# EAGLE board DevBoard PCB (EAGLE 9.7.0)
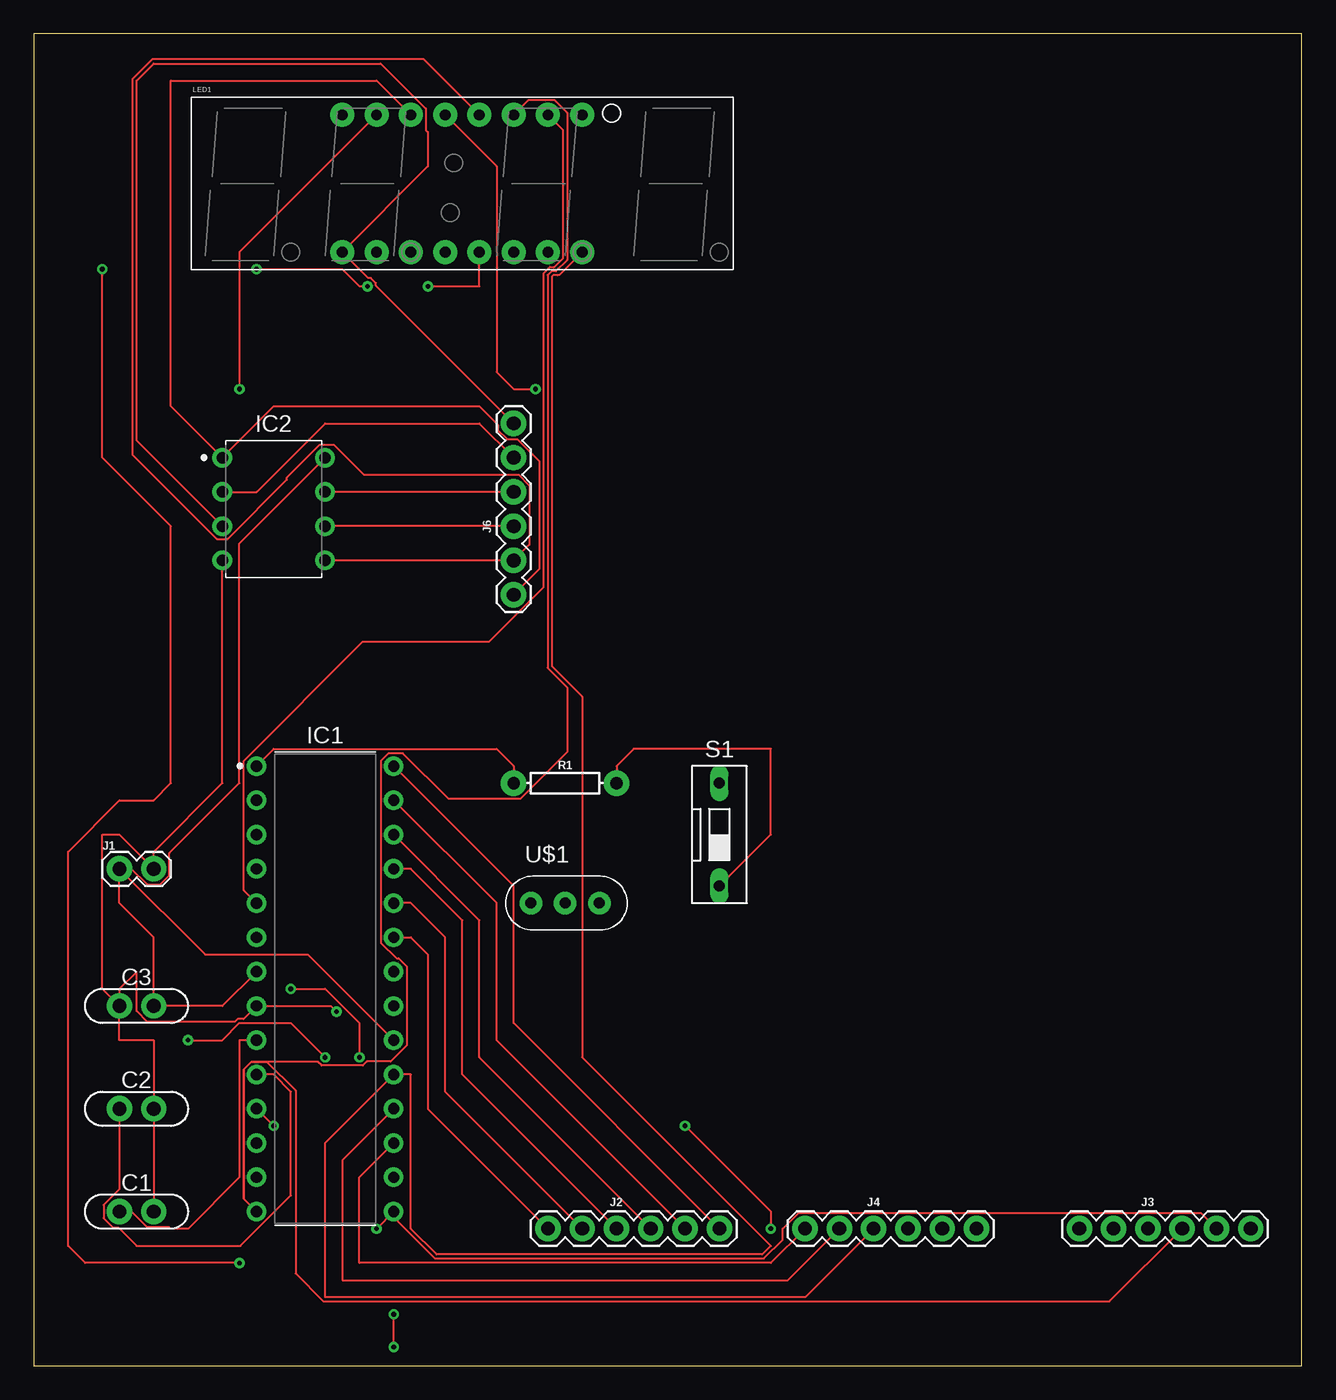
[diagram p0: board, top side]
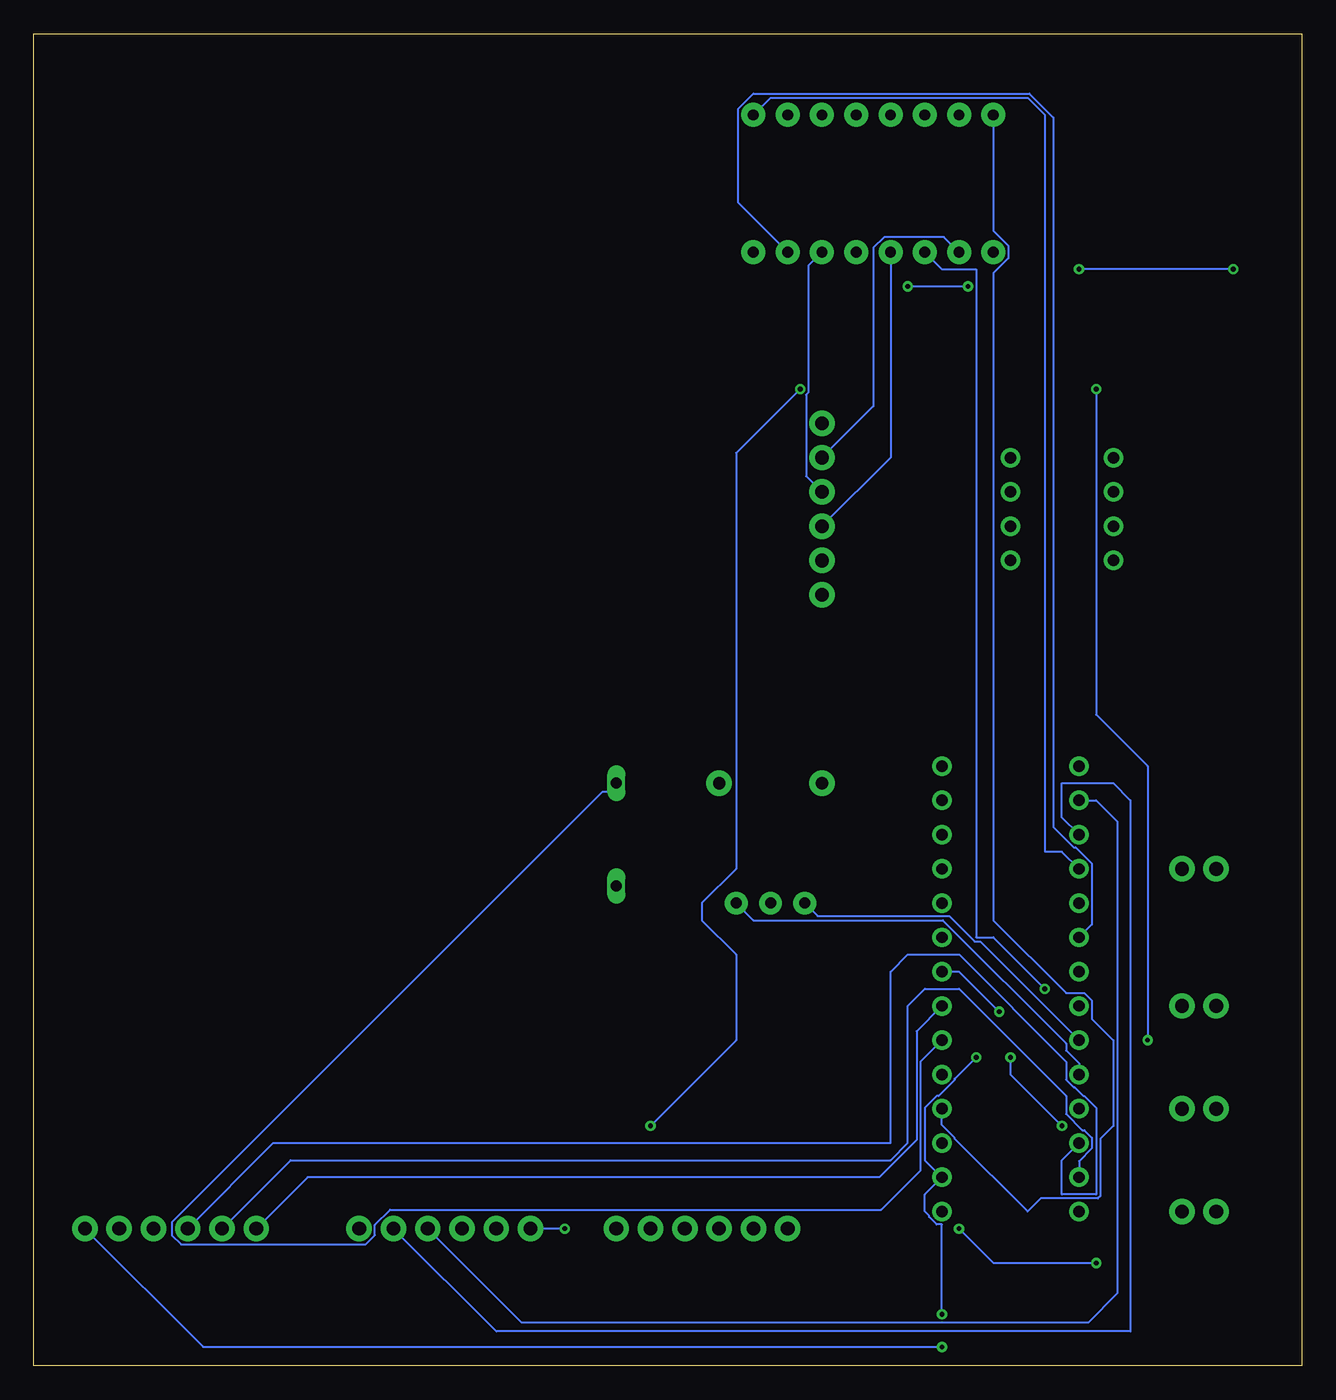
[diagram p1: board, bottom side, seen from below]

Size 93.96 x 98.73 mm. Coordinates in mm from the lower left corner, seen from the top.
Outline: 0,0 93.96,0 93.96,98.73 0,98.73 0,0
Copper layers (1*16): Top 0.035mm / dielectric 1.5mm / Bottom 0.035mm
Design rules "Fusion Electronics Design Rules": minimum track width 6mil, minimum drill 0.35mm, track to track 6mil, track to pad 6mil, pad to pad 6mil, via to via 6mil, smd to smd 6mil, copper to edge 40mil, drill to drill 6mil, minimum pad ring 10mil, minimum via ring 8mil, stop-mask expansion 4mil, vias tented up to drill 9999mil, thermal gap 10mil

## Footprints (pad centres in the part's own frame; a part is rotated, then mirrored left to right if it is on the bottom)
CAP-THRU-2.54MM = drill 1.016 pad 1.88: 1 -1.27,0; 2 1.27,0
DIP1016W53P254L3467H457Q28B = drill 0.841 pad 1.441: 1 -5.08,16.51; 2 -5.08,13.97; 3 -5.08,11.43; 4 -5.08,8.89; 5 -5.08,6.35; 6 -5.08,3.81; 7 -5.08,1.27; 8 -5.08,-1.27; 9 -5.08,-3.81; 10 -5.08,-6.35; 11 -5.08,-8.89; 12 -5.08,-11.43; 13 -5.08,-13.97; 14 -5.08,-16.51; 15 5.08,-16.51; 16 5.08,-13.97; 17 5.08,-11.43; 18 5.08,-8.89; 19 5.08,-6.35; 20 5.08,-3.81; 21 5.08,-1.27; 22 5.08,1.27; 23 5.08,3.81; 24 5.08,6.35; 25 5.08,8.89; 26 5.08,11.43; 27 5.08,13.97; 28 5.08,16.51
DIP787W55P254L958H533Q8B-8P3 = drill 0.852 pad 1.452: 1 -3.81,3.81; 2 -3.81,1.27; 3 -3.81,-1.27; 4 -3.81,-3.81; 5 3.81,-3.81; 6 3.81,-1.27; 7 3.81,1.27; 8 3.81,3.81
1X02 = drill 1.016 pad 1.88: 1 0,0; 2 2.54,0
FTDI_BASIC = drill 1.016 pad 1.88: CTS 10.16,0; DTR 0,0; GND 12.7,0; RXI 2.54,0; TXO 5.08,0; VCC 7.62,0
7-SEGMENT-4DIGIT-YOUNGSUN = drill 0.8 pad 1.778: 1 -8.89,-5.08; 2 -6.35,-5.08; 3 -3.81,-5.08; 4 -1.27,-5.08; 5 1.27,-5.08; 6 3.81,-5.08; 7 6.35,-5.08; 8 8.89,-5.08; 9 8.89,5.08; 10 6.35,5.08; 11 3.81,5.08; 12 1.27,5.08; 13 -1.27,5.08; 14 -3.81,5.08; 15 -6.35,5.08; 16 -8.89,5.08
AXIAL-0.3 = drill 0.9 pad 1.88: P$1 -3.81,0; P$2 3.81,0
DS-01 = drill 0.813 long: 1 0,-3.81; 2 0,3.81
CERM_OSC = drill 0.813 pad 1.676: P$1 -2.54,0; P$2 0,0; P$3 2.54,0

## Placement (x,y rotation side)
C1  [CAP-THRU-2.54MM]  7.62,11.43 0 top
C2  [CAP-THRU-2.54MM]  7.62,19.05 0 top
C3  [CAP-THRU-2.54MM]  7.62,26.67 0 top
IC1  ATMEGA328  [DIP1016W53P254L3467H457Q28B]  21.59,27.94 0 top
IC2  ATtiny25-20PU  [DIP787W55P254L958H533Q8B-8P3]  17.78,63.5 0 top
J1  [1X02]  6.35,36.83 0 top
J2  6_PIN_SERIAL_CABLEPTH  [FTDI_BASIC]  38.1,10.16 0 top
J3  6_PIN_SERIAL_CABLEPTH  [FTDI_BASIC]  77.47,10.16 0 top
J4  6_PIN_SERIAL_CABLEPTH  [FTDI_BASIC]  57.15,10.16 0 top
J6  6_PIN_SERIAL_CABLEPTH  [FTDI_BASIC]  35.56,57.15 90 top
LED1  YSD-439AR6B-35  [7-SEGMENT-4DIGIT-YOUNGSUN]  31.75,87.63 0 top
R1  100  [AXIAL-0.3]  39.37,43.18 0 top
S1  DS01E  [DS-01]  50.8,39.37 0 top
U$1  [CERM_OSC]  39.37,34.29 0 top

## Library data of the parts
C1-C3 = Tinkercad
IC1 = IC_Embedded; CATEGORY: IC_Embedded; MANUFACTURER: Microchip Technologies; MPN: ATmega328-PN; OPERATING_TEMP: –40 to +105°C; PART_STATUS: Active; SUB-CATEGORY: Microcontroller
IC2 = Tinkercad; CATEGORY: IC_Embedded; CORE: AVR; DESCRIPTION: AVR AVR® ATtiny, Functional Safety (FuSa) Microcontroller IC 8-Bit 20MHz 2KB (1K x 16) FLASH 8-PDIP; MANUFACTURER: Microchip Technology; MPN: ATtiny25-20PU; OPERATING_TEMP: -40°C to 85°C; PART_STATUS: Active; ROHS_COMPLIANT: COMPLIANT; SERIES: ATtiny25; SPEED: 20 MHz; SUB-CATEGORY: Microcontroller; TYPE: AVR Microcontroller
J1-J4 J6 = SparkFun-Connectors
LED1 = SparkFun-LED; PROD_ID: COMP-09493
R1 = SparkFun-Resistors; PROD_ID: RES-12181
S1 = Switch; CATEGORY: Switches; MANUFACTURER: Multicomp Pro; OPERATING_TEMPERATURE: -40°C ~ 85°C; PACKAGE_SIZE: NA; PACKAGE_TYPE: THT; PART_STATUS: OBSOLETE; ROHS: COMPLIANT; SUBCATEGORY: DIP Switches; TYPE: SPST-NO
U$1 = adafruit

## Nets
N$1: C1.1 IC1.9 U$1.P$1
N$2: C2.1 IC1.10 U$1.P$3
N$3: IC1.23 J2.DTR
N$4: C3.2 IC1.7 IC1.20 IC2.8 J1.1 S1.2
N$5: IC1.1 R1.P$1
N$6: R1.P$2 S1.1
N$7: IC1.24 J2.RXI
N$8: C1.2 C2.2 C3.1 IC1.8 IC1.22 IC2.4 J1.2
N$9: IC1.25 J2.TXO
N$10: IC1.26 J2.VCC
N$11: IC1.27 J2.CTS
N$12: IC1.28 J2.GND
N$13: IC1.21 J3.DTR
N$14: IC1.13 J3.RXI
N$15: IC1.12 J3.TXO
N$16: IC1.14 J3.VCC LED1.11
N$17: IC1.15 J3.CTS LED1.5
N$18: IC1.16 J3.GND LED1.3
N$19: IC1.17 J4.DTR LED1.13
N$20: IC1.18 J4.RXI LED1.16
N$21: IC1.19 J4.TXO LED1.8
N$22: IC1.2 J4.VCC
N$23: IC1.3 J4.CTS
N$24: IC2.3 J6.GND LED1.1
N$25: IC2.2 J6.CTS LED1.2
N$26: IC2.7 J6.VCC LED1.6
N$27: IC2.6 J6.TXO LED1.4
N$28: IC2.5 J6.RXI LED1.12
N$29: IC2.1 J6.DTR LED1.14
N$30: IC1.4 LED1.9
N$31: IC1.5 LED1.10
N$32: IC1.6 LED1.7
N$33: IC1.11 LED1.15

## Tracks (layer width: path | path; a pad name or v marks a point on that pad's centre or on a via)
N$1
  Top 0.152: C1.1 7.24,11.43 8.41,10.26 10.06,10.26 10.16,10.16 11.43,10.16 15.24,13.97 15.24,24.13 IC1.9
  Bottom 0.152: U$1.P$1 35.87,33.33 26.14,33.33 24.26,31.45 23.82,31.45 IC1.9
N$2
  Top 0.152: C2.1 6.35,13.08 5.18,11.91 5.18,10.95 5.87,10.26 6.25,10.26 7.62,8.89 15.31,8.89 19.05,12.63 19.05,20.32 17.78,21.59 IC1.10
  Bottom 0.152: U$1.P$3 40.64,33.02 26.6,33.02 17.46,23.88 17.46,23.37 16.51,22.42 IC1.10
N$3
  Top 0.152: J2.DTR 29.21,19.05 29.21,30.48 27.94,31.75 IC1.23
N$4
  Top 0.152: J1.1 6.35,34.29 8.89,31.75 C3.2 13.97,26.67 IC1.7 | J1.1 12.7,30.48 20.32,30.48 IC1.20 | J1.1 7.24,36.83 8.41,35.66 9.37,35.66 10.06,36.35 10.06,38 15.24,43.18 15.24,60.96 IC2.8
  Bottom 0.152: S1.2 50.8,42.52 51.84,42.52 83.72,10.64 83.72,9.68 83.03,8.99 69.37,8.99 68.68,9.68 68.68,10.44 67.55,11.57 31.18,11.57 28.25,14.5 28.25,22.55 IC1.20
N$5
  Top 0.152: IC1.1 17.78,45.72 34.29,45.72 35.56,44.45 R1.P$1
N$6
  Top 0.152: S1.1 54.61,39.37 54.61,45.72 44.45,45.72 43.18,44.45 R1.P$2
N$7
  Top 0.152: J2.RXI 30.48,20.32 30.48,31.75 27.94,34.29 IC1.24
N$8  (via drill 0.35)
  Top 0.152: C1.2 C2.2 8.89,24.13 6.35,24.13 C3.1 | C3.1 6.35,27.94 7.62,29.21 7.62,26.29 8.41,25.5 14.91,25.5 15.11,25.7 15.55,25.7 IC1.8 22,26.67 v22.43,26.24 | C3.1 5.08,27.94 5.08,39.37 6.35,39.37 J1.2 8.89,38.1 13.97,43.18 IC2.4
  Bottom 0.152: IC1.22 25.4,29.21 v22.43,26.24
N$9
  Top 0.152: J2.TXO 31.75,21.59 31.75,33.02 27.94,36.83 IC1.25
N$10
  Top 0.152: J2.VCC 33.02,22.86 33.02,33.02 IC1.26
N$11
  Top 0.152: J2.CTS 34.29,24.13 34.29,34.29 IC1.27
N$12
  Top 0.152: J2.GND 35.56,25.4 35.56,35.56 IC1.28
N$13
  Bottom 0.152: J3.DTR 73.66,13.97 31.32,13.97 28.55,16.74 28.55,24.79 IC1.21
N$14
  Bottom 0.152: J3.RXI 74.93,15.24 30.48,15.24 29.21,16.51 29.21,26.67 27.94,27.94 25.4,27.94 17.46,20 17.46,18.66 16.26,17.46 16.12,17.46 15.56,16.9 15.56,16.12 16.51,15.17 IC1.13
N$15
  Bottom 0.152: J3.TXO 76.2,16.51 30.48,16.51 30.48,29.21 29.21,30.48 25.4,30.48 17.46,22.54 17.46,21.2 16.9,20.64 16.83,20.64 16.19,20 16.12,20 15.24,19.12 15.24,12.7 17.78,12.7 17.78,15.24 IC1.12
N$16
  Top 0.152: 15.56,12.38 IC1.14 15.56,12.38 | 15.56,12.38 15.56,21.98 | 15.56,21.98 16.12,22.54 | 16.12,22.54 17.26,22.54 19.4,20.4 19.4,6.84 21.46,4.78 79.7,4.78 J3.VCC | LED1.11 36.68,93.83 38.56,93.83 39.52,92.87 39.52,81.96 38.69,81.13 38.36,81.13 38.08,80.85 38.08,51.72 39.52,50.28 39.52,45.49 36.04,42.01 30.74,42.01 27.35,45.4 26.28,45.4 25.72,44.84 25.72,31.36 26.88,30.19 27.03,30.19 27.62,29.6 27.62,23.74 26.44,22.55 24.68,22.55 24.38,22.25 21.34,22.25 21.05,22.54 16.12,22.54 | 15.56,21.98 15.56,12.38 | 16.12,22.54 15.56,21.98
N$17  (via drill 0.35)
  Top 0.152: J3.CTS 86.46,11.33 56.67,11.33 55.49,10.16 55.49,9.34 54.1,7.95 29.72,7.95 26.67,11 IC1.15 v25.4,10.16 | v15.24,7.62 3.81,7.62 2.54,8.89 2.54,38.1 6.35,41.91 8.89,41.91 10.16,43.18 10.16,62.23 5.08,67.31 v5.08,81.28 | v16.51,81.28 22.86,81.28 24.13,80.01 v24.74,80.01 | v29.21,80.01 33.02,80.01 LED1.5
  Bottom 0.152: v25.4,10.16 22.86,7.62 v15.24,7.62 | v5.08,81.28 v16.51,81.28 | v29.21,80.01 v24.74,80.01
N$18  (via drill 0.35)
  Top 0.152: v19.05,27.94 21.59,27.94 24.13,25.4 v24.13,22.86 | v26.67,1.39 v26.67,3.81
  Bottom 0.152: LED1.3 26.67,81.28 24.13,81.28 24.13,31.75 22.86,31.75 v19.05,27.94 | v26.67,3.81 26.67,10.48 27.06,10.48 27.62,11.04 27.62,11.11 27.94,11.43 27.94,12.7 IC1.16 27.94,15.24 27.94,19.12 27.06,20 26.92,20 25.72,21.2 25.72,21.27 v24.13,22.86 | J3.GND 81.4,1.39 v26.67,1.39
N$19  (via drill 0.35)
  Top 0.152: J4.DTR 54.61,7.62 24.13,7.62 24.13,13.97 IC1.17 | LED1.13 34.29,88.9 34.29,73.66 35.56,72.39 v37.17,72.39 | v48.26,17.78 54.61,11.43 v54.61,10.16
  Bottom 0.152: v48.26,17.78 41.91,24.13 41.91,30.48 44.45,33.02 44.45,34.29 41.91,36.83 41.91,67.65 v37.17,72.39 | v54.61,10.16 J4.DTR
N$20
  Top 0.152: J4.RXI 55.88,6.35 22.86,6.35 22.86,15.24 IC1.18
  Bottom 0.152: LED1.16 22.86,84.13 21.74,83.01 21.74,82.09 22.86,80.97 22.86,33.02 17.46,27.62 16.12,27.62 15.56,27.06 15.56,25.72 13.97,24.13 13.97,17.78 14.93,16.82 14.93,12.57 15.11,12.39 19.36,12.39 20.32,11.43 25.72,16.83 25.72,16.9 26.67,17.85 IC1.18
N$21
  Top 0.152: J4.TXO 57.15,5.08 21.59,5.08 21.59,16.51 IC1.19 27.94,21.59 27.94,10.16 29.84,8.25 53.97,8.25 54.61,8.89 40.64,22.86 40.64,49.59 38.39,51.85 38.39,80.72 38.49,80.82 38.81,80.82 38.85,80.85 38.94,80.85 LED1.8
N$22
  Bottom 0.152: IC1.2 15.24,41.91 13.67,40.34 13.67,5.38 15.85,3.2 57.81,3.2 J4.VCC
N$23
  Bottom 0.152: J4.CTS 59.69,2.54 12.7,2.54 12.7,41.91 13.97,43.18 17.78,43.18 17.78,40.64 IC1.3
N$24
  Top 0.152: IC2.3 7.62,68.58 7.62,95.25 8.89,96.52 25.71,96.52 29.06,93.17 29.06,91.59 29.21,91.44 29.21,88.9 LED1.1 24.79,80.62 24.99,80.62 25.34,80.26 25.34,80.07 J6.GND
N$25
  Top 0.152: IC2.2 16.51,64.77 21.59,69.85 33.02,69.85 J6.CTS
  Bottom 0.152: LED1.2 26.52,83.67 30.94,83.67 31.75,82.86 31.75,71.12 J6.CTS
N$26
  Top 0.152: J6.VCC IC2.7
  Bottom 0.152: J6.VCC 36.73,65.94 36.73,71.97 36.56,72.14 36.56,81.55 LED1.6
N$27
  Top 0.152: J6.TXO IC2.6
  Bottom 0.152: LED1.4 30.48,67.31 J6.TXO
N$28
  Top 0.152: IC2.5 J6.RXI 36.73,60.86 36.73,65.25 35.94,66.04 24.46,66.04 22.23,68.27 21.2,68.27 18.76,65.83 18.76,65.67 14.37,61.27 13.58,61.27 7.32,67.54 7.32,95.38 8.76,96.83 28.91,96.83 LED1.12
N$29
  Top 0.152: LED1.14 25.4,95.25 10.16,95.25 10.16,71.12 IC2.1 17.78,71.12 33.02,71.12 34.39,69.75 34.39,69.37 35.08,68.68 35.84,68.68 37.47,67.05 37.47,59.06 J6.DTR
N$30
  Bottom 0.152: LED1.9 39.37,93.98 20.32,93.98 19.05,92.71 19.05,38.1 17.78,38.1 IC1.4
N$31
  Top 0.152: LED1.10 39.22,91.59 39.22,82.09 38.56,81.43 38.24,81.43 37.78,80.97 37.78,57.71 33.73,53.67 24.39,53.67 15.56,44.84 15.56,35.24 IC1.5
N$32
  Bottom 0.152: LED1.7 41.76,86.21 41.76,93.17 40.65,94.29 20.19,94.29 18.42,92.51 18.42,39.94 16.9,38.42 16.76,38.42 15.56,37.22 15.56,32.7 IC1.6
N$33  (via drill 0.35)
  Top 0.152: LED1.15 15.24,82.55 v15.24,72.39 | v11.43,24.13 13.97,24.13 15.24,25.4 19.05,25.4 v21.59,22.86 | v17.78,17.78 IC1.11
  Bottom 0.152: v15.24,72.39 15.24,48.26 11.43,44.45 v11.43,24.13 | v21.59,22.86 21.59,21.59 v17.78,17.78